# EAGLE board NeoJointV2A-082p43 (EAGLE 6.6.0)
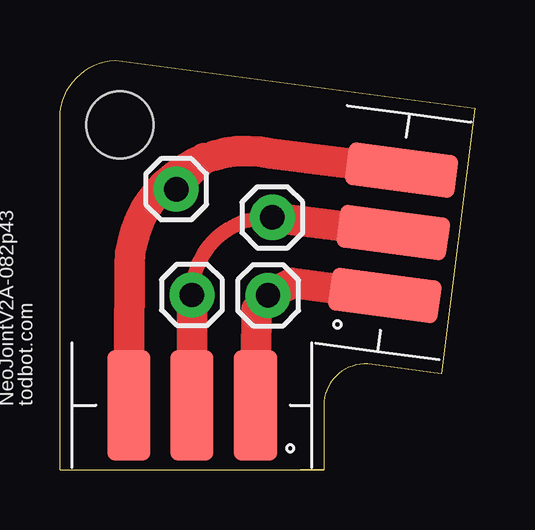
[diagram p0: board, top side]

Size 17.3 x 17.1 mm. Coordinates in mm from the lower left corner, seen from the top.
Outline: 10.04,0 0,0 0,13.9 0,14.5 arc-90 2.3,17.1 17.3,15.1 15.9,4 13,4.4 arc98 11,2.7 11,0
Outline: 10.04,0 11,0
Outline: 11,0 10.04,0
Copper layers (1*16): Top 0.0356mm / dielectric 1.5011mm / Bottom 0.0356mm
Design rules "LaenPCBOrder-tod": minimum track width 10mil, minimum drill 13mil, track to track 6mil, track to pad 8mil, pad to pad 8mil, via to via 8mil, smd to smd 6mil, copper to edge 15mil, drill to drill 8mil, minimum pad ring 7mil, minimum via ring 7mil, stop-mask expansion 4mil, vias tented up to drill 25mil, thermal gap 10mil
Holes 2.8 mm at 2.5,14.4

## Footprints (pad centres in the part's own frame; a part is rotated, then mirrored left to right if it is on the bottom)
1X01 = drill 1.016 pad 1.88: 1 0,0
LEDSTRIP-3P = smd 4.6 x 1.8: A 0,-2.65; B 0,0; C 0,2.63

## Placement (x,y rotation side)
JP1  [1X01]  8.68,7.28 0 top
JP2  [1X01]  8.86,10.54 0 top
JP3  [1X01]  4.85,11.71 0 top
JP4  [1X01]  5.5,7.3 0 top
U$1  LED_STRIP_3P  [LEDSTRIP-3P]  5.5,2.7 90 top
U$2  LED_STRIP_3P  [LEDSTRIP-3P]  13.9,9.9 352.4 top

## Library data of the parts
JP1-JP4 = SparkFun-Connectors
U$1 U$2 = todstuff

## Nets
A: JP1.1 U$1.A U$2.A
B: JP2.1 JP4.1 U$1.B U$2.B
C: JP3.1 U$1.C U$2.C

## Tracks (layer width: path | path; a pad name or v marks a point on that pad's centre or on a via)
A
  Top 1.27: U$2.A 9.7,7.8 JP1.1 8.2,6.7 U$1.A
B
  Top 0.61: JP2.1 8.74,10.54 arc90 JP4.1
  Top 1.27: U$2.B JP2.1 | U$1.B JP4.1
C
  Top 0.61: 8.8,13.2 6.2,13.2 arc90 5,12
  Top 1.27: U$2.C 8.8,13.2 arc105 2.9,8.1 U$1.C | JP3.1 5,12 6,13

## Text on the board
tPlace: NeoJointV2A-082p43 | todbot.com